# Altium PCB Smart_Clock_PCB.PcbDoc (part 2 of 2)
Units mil, origin at the board's own origin, x right, y up, seen from the top; angles counter-clockwise.
Board outline 3930 x 2549 mil, 2 copper layers (Top Layer, Bottom Layer); 123 components, 100 nets, 411 pads, 288 vias.
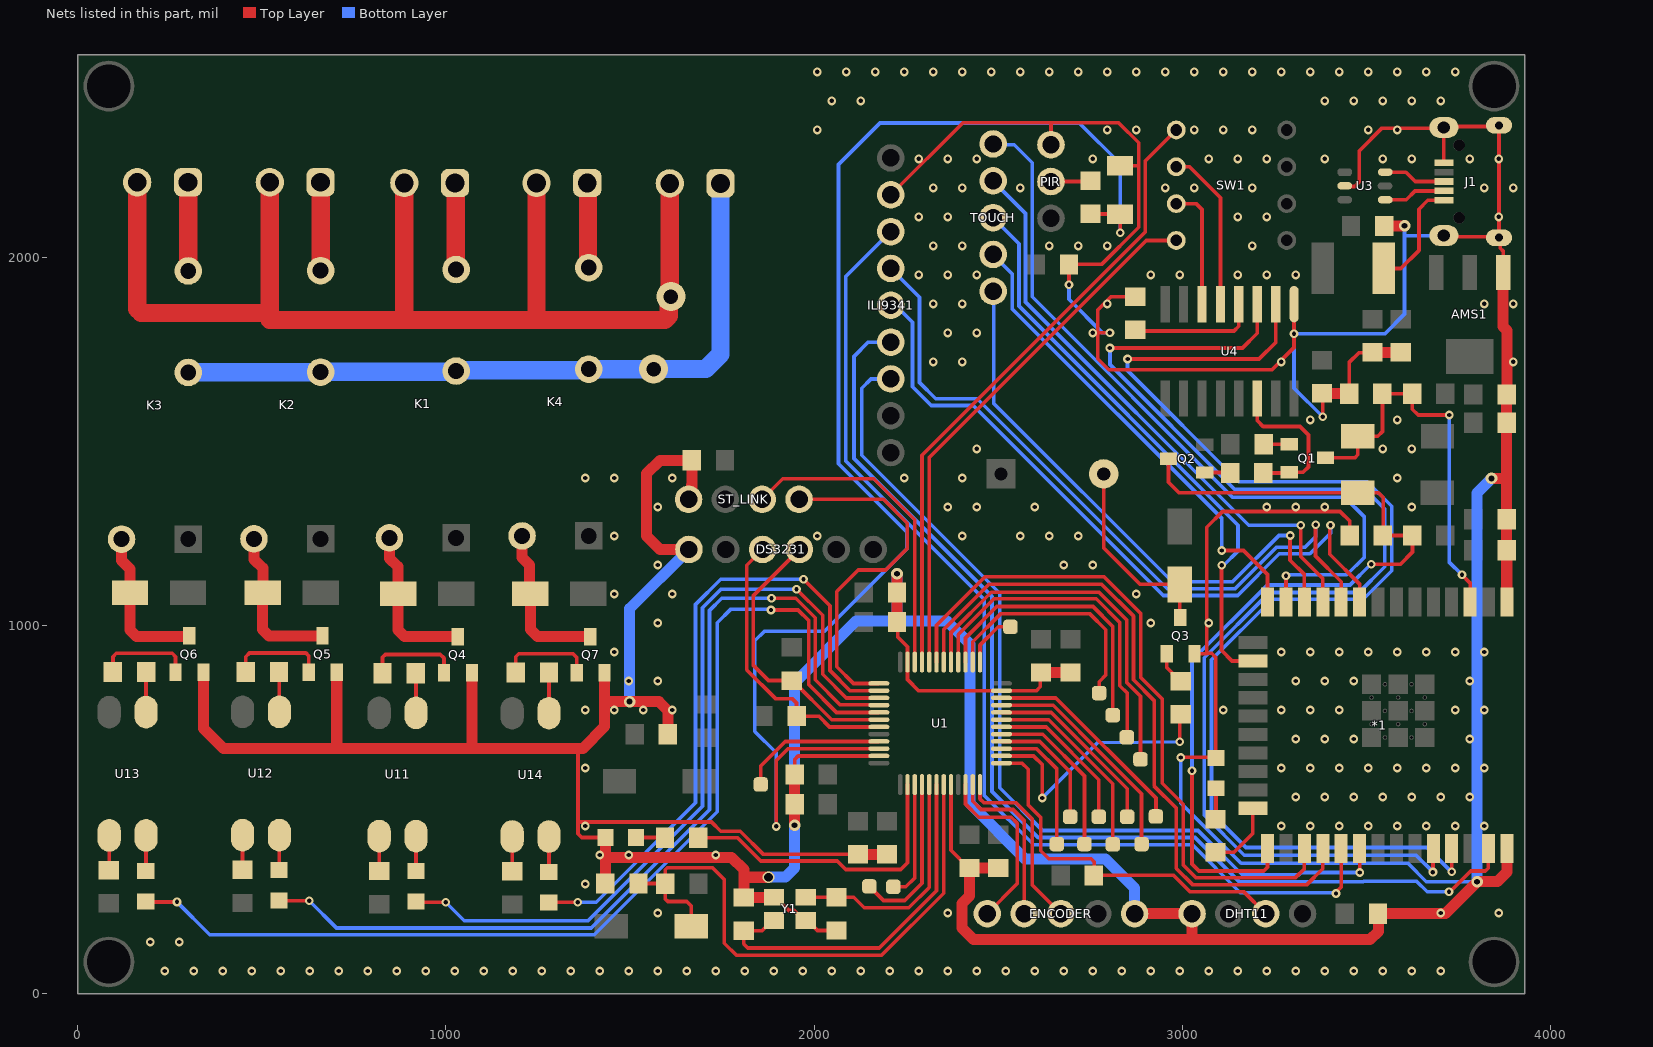
[diagram p2: the nets of this part, all layers, seen from the top]

## Via types
v1: diameter 23.62, hole 11.81, Top Layer to Bottom Layer, tented both sides, 271 vias
v2: diameter 31.5, hole 15.75, Top Layer to Bottom Layer, tented both sides, 16 vias
v3: diameter 31.5, hole 23.62, Top Layer to Bottom Layer, tented both sides, 1 vias

## Nets (pads, with @x,y where several pads share a name; then routed paths per layer and width w, separated by ;. In a path a pad name is that pad's centre, name@x,y a point inside that pad or via, vN(x,y) a via of type N, cw(c..) or ccw(c..) an arc to the next point about the centre after c; other vN are vias at no path point) (continued)
GND: *1.1 *1.38 AMS1.1 C3.1 C4.1 C5.1 C6.1 C7.1 C8.1 C9.1 C10.1 C11.1 C12.2 C13.2 C14.1 C15.1 C18.1 C19.1 C20.2 C21.2 C22.1 C23.1 C24.1 C25.1 C26.1 C27.1 C28.1 D4.2 DHT11.4 DS3231.6 ENCODER.5 ESP_LED.1 ILI9341.13 J1.5 J1.Shell PIR.3 Q3.2 Q4.2 Q5.2 Q6.2 Q7.2 R1.1 R2.1 R6.1 R7.1 ST_LINK.4 STM_LED.2 U1.8 U1.23 U1.35 U1.47 U3.2 U4.1 Y1.2 Y1.4 | length 20601.3
  Top Layer w10: 1359,666 1359,466 ; STM_LED.2@1433.66,424 1369,424 1359,434 1359,466 ; Y1.2@1890.69,261.5 1895.61,261.5 1922.97,234.14 1923.64,234.14 1931.92,225.86 1945.03,225.86 1972.39,198.5 Y1.4@1977.31,198.5 1982.23,198.5 2009.23,171.5 C12.2@2060.5,171.5 ; C11.1@1947,595 1947,636 1956.42,645.42 U1.47@2175.66,645.42 U1.47@2176.01,645.07 ; C6.1@2119,378 1862.46,378 1799.46,441 1746.14,441 1721.14,466 1359,466 ; ILI9341.13@2208,2169 2403.14,2364.14 2642,2364.14 ; C15.1@2225,1009 2226.86,1007.14 2226.86,968.14 2253.42,941.58 U1.35@2253.42,900.34 2253.42,852.58 2283.42,822.58 U1.23@2508.34,822.58 2603.58,822.58 2614,833 2614,870 C5.1@2616,872 ; U1.8@2371.53,567.66 2371.53,388.97 2418.5,342 C9.1@2421,342 ; PIR.3@2651.82,2313.82 PIR.3@2643,2305 2643,2363.14 2642,2364.14 ; v1(2692,1925) C24.1@2692,1980 2780.09,1980 2881,2080.91 2881,2246 ; v1(2803,1794) 2770,1794 ; D4.2@2830,2247.89 2879.11,2247.89 2881,2246 ; C21.2@2872,1892 2806,1892 2770,1856 2770,1794 ; v1(2995,641) 2996.21,642.21 3089.13,642.21 ESP_LED.1@3091,640.34 ; Q3.2@3032.8,922.79 3066,922.79 ; v1@3066,1006.51 3066,924 3079.21,924 3090,913.21 3090,642.55 ESP_LED.1@3091,641.55 ; v1(3071.74,1006.51) 3071.74,1006.65 3066,1012.39 3066,1266.21 3109,1309.21 3428,1309.21 3454,1283.21 R7.1@3454,1244 ; U4.1@3303.01,1871.94 v1(3303,1792) 3303,1754 3243,1694 2800,1694 2770,1724 2770,1794 ; C20.2@3379,1630 3379.5,1629.5 3381,1628 v1(3381,1566) ; U3.2@3440.59,2193.4 3442.5,2191.49 3467.49,2191.49 3480,2204 3480,2288 3542,2350 3708.17,2350 J1.Shell@3709.83,2351.68 ; R6.1@3453,1629 3452.5,1629.5 3452.5,1713.5 3479.36,1740.36 3515.36,1740.36 C26.1@3516,1741 ; J1.Shell@3709.83,2058.35 3712.78,2055.39 3856.48,2055.39 J1.Shell@3859.43,2052.44 ; J1.5@3709.83,2256.21 J1.Shell@3709.83,2351.68 ; AMS1.1@3870.55,1958.17 3870.55,2016.45 3863,2024 3863,2048.87 J1.Shell@3859.43,2052.44 ; 2642,2364.14 2826.86,2364.14 2881,2310 2881,2246 ; J1.Shell@3709.83,2351.68 3712.78,2354.61 3856.48,2354.61 J1.Shell@3859.43,2357.59 J1.Shell@3859.43,2052.44
  Top Layer w30: Q6.2@341.8,872.79 341.8,720.2 396,666 705,666 ; Q5.2@703.8,872.79 703.8,667.2 705,666 ; Q4.2@1070.91,870.68 1070.91,666 ; Q7.2@1430.8,870.79 1430.8,793 ; R2.1@1433,299 1433.33,299.33 1433.33,373 ; STM_LED.2@1433.66,424 1433.33,423.67 1433.33,373 ; R1.1@1603,704 1603,768 1578,793 v2(1499,793) 1430.8,793 ; ST_LINK.4@1659,1342 1667.57,1350.57 1667.57,1381.55 1668,1381.98 C3.1@1668,1448 1581,1448 1545,1412 1545,1243 1582,1206 DS3231.6@1660,1206 DS3231.6@1659.5,1206.5 ; v3(1876,316) 1809,316 ; Y1.2@1890.69,261.5 1890.44,261.25 1809.25,261.25 C13.2@1809,261 1809,316 ; v2(1947,457) C10.1@1947,514 C11.1@1947,595 ; C6.1@2119,378 C7.1@2198,378 ; C15.1@2225,1009 C14.1@2225,1089 v2(2225,1140) ; C9.1@2421,342 C9.1@2422,341 ; C8.1@2500,341 C9.1@2422,341 ; C5.1@2616,872 C4.1@2696,872 ; ENCODER.5@2870,217 DHT11.4@3026,217 3026,147 ; C20.2@3379.5,1629.5 R6.1@3452.5,1629.5 ; C26.1@3516,1741 C25.1@3593,1741 ; C22.1@3547.5,2084.5 3547.75,2084.75 3602.75,2084.75 v2(3603,2085) ; v2(3839,1399) 3839.29,1398.71 3869.03,1398.71 3869.75,1398 3880,1398 ; AMS1.1@3870.55,1958.17 3870.55,1811.45 3881,1801 3881,1628 C28.1@3880,1627 C27.1@3880,1550 3880,1398 ; *1.38@3881,393.71 3881,330 3855.29,304.29 3800.29,304.29 v2(3800,304) 3800,303.6 3799.25,302.85 3799.25,302.68 3713.57,217 C23.1@3531,217 3532,216 3532,169.29 3509.71,147 3026,147 ; *1.1@3881,1063 3880.5,1063.5 3880.5,1203.5 C19.1@3880,1204 C18.1@3880,1288 3880,1398 ; 705,666 1070.91,666 ; 1070.91,666 1359,666 1372,666 1430.8,724.8 1430.8,793 ; 1433.33,373 1436.33,370 1776,370 1809,337 1809,316 ; C9.1@2422,341 2422,265 2402,245 2402,178 2433,147 3026,147
  Bottom Layer w10: v1(2692,1925) 2692,1885 2783,1794 v1(2803,1794) ; v1(2995,641) 2995,518 3159.19,353.81 3612.3,353.81 3662.11,304 v2(3800,304) ; v1(3381,1566) 3303,1644 v1(3303,1792) 3550,1792 3603,1845 3603,2057.73 ; v2(3603,2085) 3603,2057.73 ; J1.Shell@3709.83,2058.37 3708.82,2057.37 3603.37,2057.37 3603,2057.73
  Bottom Layer w30: v2(1499,793) 1499,1045 DS3231.6@1660,1206 ; v3(1876,316) 1876.29,316.29 1922.29,316.29 1947,341 v2(1947,457) 1947,635.7 1946,636.7 1946,844 2114,1012 2228,1012 ; v2(2225,1140) 2225,1015 2228,1012 ; ENCODER.5@2870,217 2870,287 2791,366 2573,366 2423,516 2423,949 2360,1012 2228,1012 ; v2(3800,304) 3800,1359.6 3839,1398.6 v2(3839,1399)
  other v1: 237.09,61.62 315.83,61.62 394.57,61.62 473.31,61.62 552.05,61.62 630.79,61.62 709.53,61.62 788.27,61.62 867.01,61.62 945.75,61.62 1024.49,61.62 1103.23,61.62 1181.97,61.62 1260.71,61.62 1339.45,61.62 1418.19,61.62 1496.93,61.62 1575.67,61.62 1654.41,61.62 1733.15,61.62 1811.89,61.62 1890.63,61.62 1969.37,61.62 2048.11,61.62 2126.85,61.62 2205.59,61.62 2284.33,61.62 2363.07,61.62 2441.81,61.62 2520.55,61.62 2599.29,61.62 2678.03,61.62 2756.77,61.62 2835.52,61.62 2914.26,61.62 2993,61.62 3071.74,61.62 3150.48,61.62 3229.22,61.62 3307.96,61.62 3386.7,61.62 3465.44,61.62 3544.18,61.62 3622.92,61.62 3701.66,61.62 197.72,140.36 276.46,140.36 1575.67,219.1 2363.07,219.1 3701.66,219.1 3859.14,219.1 1378.82,297.84 1418.19,376.58 1496.93,376.58 1733.15,376.58 1378.82,455.32 3268.59,455.32 3347.33,455.32 3426.07,455.32 3504.81,455.32 3583.55,455.32 3662.29,455.32 3741.03,455.32 3819.77,455.32 3307.96,534.06 3386.7,534.06 3465.44,534.06 3544.18,534.06 3622.92,534.06 3701.66,534.06 3780.4,534.06 1378.82,612.8 3268.59,612.8 3347.33,612.8 3426.07,612.8 3504.81,612.8 3583.55,612.8 3662.29,612.8 3741.03,612.8 3819.77,612.8 3307.96,691.54 3386.7,691.54 3465.44,691.54 3780.4,691.54 1378.82,770.28 1457.56,770.28 1536.3,770.28 1615.04,770.28 3111.11,770.28 3268.59,770.28 3347.33,770.28 3426.07,770.28 3741.03,770.28 3819.77,770.28 1496.93,849.02 1575.67,849.02 3307.96,849.02 3386.7,849.02 3465.44,849.02 3780.4,849.02 1457.56,927.76 3268.59,927.76 3347.33,927.76 3426.07,927.76 3504.81,927.76 3583.55,927.76 3662.29,927.76 3741.03,927.76 3819.77,927.76 1575.67,1006.51 2914.26,1006.51 1457.56,1085.25 1615.04,1085.25 2874.89,1085.25 1575.67,1163.99 2678.03,1163.99 2756.77,1163.99 1457.56,1242.73 2008.74,1242.73 2402.44,1242.73 2559.92,1242.73 2638.66,1242.73 2717.4,1242.73 1575.67,1321.47 2363.07,1321.47 2441.81,1321.47 2599.29,1321.47 3229.22,1321.47 3307.96,1321.47 3386.7,1321.47 3622.92,1321.47 1378.82,1400.21 1457.56,1400.21 1615.04,1400.21 2244.96,1400.21 2402.44,1400.21 3583.55,1400.21 2441.81,1478.95 3544.18,1478.95 3622.92,1478.95 3347.33,1557.69 3583.55,1557.69 2323.7,1715.17 2402.44,1715.17 3268.59,1715.17 3898.51,1715.17 2363.07,1793.91 2441.81,1793.91 2756.77,1793.91 2323.7,1872.65 2402.44,1872.65 2796.14,1872.65 3819.77,1872.65 3898.51,1872.65 2284.33,1951.39 2363.07,1951.39 2441.81,1951.39 2914.26,1951.39 2993,1951.39 3150.48,1951.39 3229.22,1951.39 3307.96,1951.39 2323.7,2030.13 2402.44,2030.13 2638.66,2030.13 2717.4,2030.13 2796.14,2030.13 3189.85,2030.13 2284.33,2108.87 2363.07,2108.87 3150.48,2108.87 3229.22,2108.87 3859.14,2108.87 2323.7,2187.61 2402.44,2187.61 2559.92,2187.61 2953.63,2187.61 3032.37,2187.61 3189.85,2187.61 3819.77,2187.61 3898.51,2187.61 2284.33,2266.35 2363.07,2266.35 2441.81,2266.35 2756.77,2266.35 3071.74,2266.35 3150.48,2266.35 3229.22,2266.35 3386.7,2266.35 3544.18,2266.35 3622.92,2266.35 3780.4,2266.35 3859.14,2266.35 2008.74,2345.09 2796.14,2345.09 2874.89,2345.09 3032.37,2345.09 3111.11,2345.09 3189.85,2345.09 3504.81,2345.09 3583.55,2345.09 2048.11,2423.83 2126.85,2423.83 3386.7,2423.83 3465.44,2423.83 3544.18,2423.83 3622.92,2423.83 3701.66,2423.83 2008.74,2502.57 2087.48,2502.57 2166.22,2502.57 2244.96,2502.57 2323.7,2502.57 2402.44,2502.57 2481.18,2502.57 2559.92,2502.57 2638.66,2502.57 2717.4,2502.57 2796.14,2502.57 2874.89,2502.57 2953.63,2502.57 3032.37,2502.57 3111.11,2502.57 3189.85,2502.57 3268.59,2502.57 3347.33,2502.57 3426.07,2502.57 3504.81,2502.57 3583.55,2502.57 3662.29,2502.57 3741.03,2502.57
L: J6.1 K1.3 K2.3 K3.3 K4.3 V1.1 | length 1929.8
  Bottom Layer w50: K3.3@300.55,1686.58 300.96,1687 659.59,1687 K2.3@660,1687.41 661.5,1688.91 1026.5,1688.91 K1.3@1028,1690.41 1030.5,1692.91 1385.5,1692.91 K4.3@1388,1695.41 1388.22,1695.63 1563.71,1695.63 V1.1@1563.94,1695.86 1705.86,1695.86 1745.8,1735.8 J6.1@1745.8,2200
LED_STATUS: *1.24 R8.1 | length 192
  Top Layer w10: R8.1@3090,384 3140,384 3190.98,434.98 3190.98,504 *1.24@3191.63,503.35
LED_TEST: R5.1 U1.2 | length 827.4
  Top Layer w10: R5.1@1685,423 1685,420.5 1687.5,423 1792,423 1855,360 2063,360 2086,337 2235,337 2253.42,355.42 U1.2@2253.42,567.66
N: J2.2 J3.2 J4.2 J5.2 J6.2 V1.2 | length 3281
  Top Layer w50: J4.2@162,2203 162,1859.33 173.33,1848 522,1848 ; J3.2@522,2203 522,1830 523,1829 885,1829 ; J2.2@887.2,2201 887.2,1831.2 885,1829 ; J5.2@1246.1,2201 1246.1,1835.41 1239.7,1829 ; J6.2@1608,2200 1608,1895.89 V1.2@1611.18,1892.71 1605.68,1887.21 1605.68,1840.29 1594.39,1829 1239.7,1829 ; 885,1829 1239.7,1829
Net1_1: 1.1 U1.22 | length 582.3
  Top Layer w10: U1.22@2508.34,802.9 2656.1,802.9 2928,531 1.1@2928,481
Net2_1: 2.1 U1.21 | length 617.4
  Top Layer w10: U1.21@2508.34,783.21 2649.24,783.21 2675,757.46 2675,757 2763.47,668.53 2763.47,668.44 2889,542.91 2.1@2889,406
Net3_1: 3.1 U1.20 | length 504.2
  Top Layer w10: U1.20@2508.34,763.53 2643.47,763.53 2643.47,762.98 2850,556.46 3.1@2850,480
Net4_1: 4.1 U1.19 | length 539.7
  Top Layer w10: U1.19@2508.34,743.84 2637.16,743.84 2811,570 4.1@2811,405
Net5_1: 5.1 U1.18 | length 425
  Top Layer w10: U1.18@2508.34,724.16 2629.84,724.16 2773,581 5.1@2773,480
Net6_1: 6.1 U1.17 | length 457.7
  Top Layer w10: U1.17@2508.34,704.47 2620.53,704.47 2734,591 6.1@2734,406
Net7_1: 7.1 U1.16 | length 343
  Top Layer w10: U1.16@2508.34,684.79 2612.21,684.79 2695,602 7.1@2695,480
Net8_1: 8.1 U1.15 | length 377.5
  Top Layer w10: U1.15@2508.34,665.1 2603.9,665.1 2659,610 8.1@2659,406
Net9_1: 9.1 U1.25 | length 149.3
  Top Layer w10: U1.25@2450.27,900.34 2450.27,946.27 2500,996 9.1@2533,996
Net10_1: 10.1 U1.26 | length 645.2
  Top Layer w10: U1.26@2430.58,900.34 2430.58,955.58 2506,1031 2749,1031 2792,988 2792,865 2774,847 10.1@2774,816
Net11_1: 11.1 U1.27 | length 764.3
  Top Layer w10: U1.27@2410.9,900.34 2410.9,965.9 2496,1051 2757,1051 2811,997 11.1@2811,756
Net12_1: 12.1 U1.28 | length 900.7
  Top Layer w10: U1.28@2391.21,900.34 2391.21,974.76 2488.46,1072 2766,1072 2830,1008 2830,836 2850,816 2850,697 12.1@2849,696
Net13_1: 13.1 U1.29 | length 1028.1
  Top Layer w10: U1.29@2371.53,900.34 2371.53,980.53 2481,1090 2773.46,1090 2849,1014.46 2849,844.54 2886,807.54 13.1@2886,636
Net14_1: 14.1 U1.4 | length 445.8
  Top Layer w10: 14.1@2150,291 2188,253 2246,253 2292.79,299.79 U1.4@2292.79,567.66
Net15_1: 15.1 U1.3 | length 325.5
  Top Layer w10: 15.1@2202,278 2203,278 15.1@2205,280 ; 15.1@2215,290 2249,290 2273,314 2273,358 2273.1,358.1 U1.3@2273.1,567.66
Net16_1: 16.1 U1.45 | length 398.3
  Top Layer w10: 16.1@1855,568 1855,618 1921.79,684.79 U1.45@2175.66,684.79
Net*1_3: *1.3 C16.1 Q1.3 R6.2 RST_ESP.1 | length 1077.7
  Top Layer w10: Q1.3@3388.43,1454.6 3467.6,1454.6 3476,1463 RST_ESP.1@3476,1513 3476.42,1513.42 3530.42,1513.42 3543,1526 R6.2@3543,1629 C16.1@3624,1629 3624,1587 3640,1571 v1(3724,1571) ; v1(3759,1137) 3781,1115 *1.3@3781,1063
  Bottom Layer w10: v1(3724,1571) 3724,1172 v1(3759,1137)
Net*1_9: *1.9 ILI9341.10 | length 1958.3
  Top Layer w10: v1(3402,1272) 3400,1270 3400,1193 3481,1112 *1.9@3481,1063
  Bottom Layer w10: ILI9341.10@2208,1869 2221,1869 2267,1823 2267,1648 2318,1597 2432,1597 2948,1081 3149.91,1081 3262.91,1194 3346,1194 3402,1250 v1(3402,1272)
Net*1_10: *1.10 ILI9341.11 | length 1980.5
  Top Layer w10: v1(3362,1273) 3361,1272 3361,1188 3431,1118 *1.10@3431,1063
  Bottom Layer w10: ILI9341.11@2208,1969 2286,1891 2286,1659 2330,1615 2443,1615 2959,1099 3142.46,1099 3255.46,1212 3333,1212 3362,1241 v1(3362,1273)
Net*1_11: *1.11 TOUCH.4 | length 1597.1
  Top Layer w10: v1(3321,1272) 3321,1187 3381,1127 *1.11@3381,1063
  Bottom Layer w10: TOUCH.4@2485.5,2206.5 2574,2118 2574,1877.8 3179.8,1272 v1(3321,1272)
Net*1_12: *1.12 TOUCH.1 | length 1558.6
  Top Layer w10: v1(3293,1244) 3292,1243 3292,1177 3331,1138 *1.12@3331,1063
  Bottom Layer w10: TOUCH.1@2486.91,1904.91 2487.91,1903.91 2487.91,1602.09 2972,1118 3136,1118 3262,1244 v1(3293,1244)
Net*1_13: *1.13 TOUCH.5 | length 2054.7
  Top Layer w10: *1.13@3281,1063 v1(3281,1135)
  Bottom Layer w10: TOUCH.5@2486,2305 2543,2305 2592,2256 2592,1892 3136,1348 3440,1348 3494,1294 3494,1185 3446.06,1137.06 3283.06,1137.06 v1(3281,1135)
Net*1_14: *1.14 TOUCH.2 | length 1286.9
  Top Layer w10: v1(3107,1203) 3166,1203 3231,1138 *1.14@3231,1063
  Bottom Layer w10: TOUCH.2@2485.5,2006.5 2538,1954 2538,1859 3107,1290 v1(3107,1203)
Net*1_16: *1.16 TOUCH.3 | length 1569.2
  Top Layer w10: v1(3107,1163) 3106,1162 3106,932 3134.65,903.35 *1.16@3191.63,903.35
  Bottom Layer w10: TOUCH.3@2485.5,2106.5 2556,2036 2556,1867 3151,1272 3151,1202 3112,1163 v1(3107,1163)
Net*1_25: *1.25 BOOT_ESP.1 C17.1 Q2.3 R7.2 | length 2434
  Top Layer w10: Q2.3@2962,1452 2962,1388.46 2990.46,1360 BOOT_ESP.1@3475.46,1360 3532,1360 3545,1347 3545,1245 R7.2@3544,1244 C17.1@3624,1244 ; v1(3026,605) 3026,352 3045,333 3221,333 3231,343 *1.25@3231,393.71 ; v1(3512.78,1165.96) 3591.78,1165.96 3624.78,1198.96 3624.78,1242.96 C17.1@3623.78,1243.96
  Bottom Layer w10: v1(3026,605) 3026,905 3230.65,1109.64 3454.65,1109.64 3511,1166 v1@3513,1166
Net*1_27: *1.27 U1.31 | length 1889.1
  Top Layer w10: U1.31@2332.16,900.34 2332.16,1000.16 2464,1132 2787,1132 2887,1032 2887,858 2945,800 2945,571 3002,514 3002,349 3036,315 3307,315 3331,339 *1.27@3331,393.71
Net*1_28: *1.28 U1.30 | length 1911.8
  Top Layer w10: U1.30@2351.84,900.34 2351.84,988.84 2474.14,1111.14 2780.86,1111.14 2867,1025 2867,852 2923,796 2923,564 2983,504 2983,340 3027,296 3338,296 3381,339 *1.28@3381,393.71
Net*1_29: *1.29 ILI9341.12 | length 2930
  Top Layer w10: v1(3417,272) 3417,275.69 3431,289.69 *1.29@3431,393.71
  Bottom Layer w10: ILI9341.12@2208,2069 2086,1947 2086,1446 2462,1070 2462,538 2596,404 3027,404 3157.07,273.93 3415.07,273.93 v1(3417,272)
Net*1_30: *1.30 ILI9341.8 | length 2471.6
  Top Layer w10: v1(3481,329) *1.30@3481,393.71
  Bottom Layer w10: ILI9341.8@2208,1669 2154,1669 2129,1644 2129,1462 2504,1087 2504,559 2620,443 3042,443 3162,323 3316.66,323 3322.66,329 v1(3481,329)
Net*1_34: *1.34 U4.3 | length 3374.5
  Top Layer w10: v1(2803,1753) 3163,1753 3203.02,1793.02 U4.3@3203.02,1871.95 ; v1(3680,330) 3680,392.71 *1.34@3681,393.71
  Bottom Layer w10: v1(2803,1753) 2803,1708 3142,1369 3496,1369 3549,1316 3549,1159 3479,1089 3236,1089 3059,912 3059,485 3168,376 3634,376 v1(3680,330)
Net*1_35: *1.35 U4.2 | length 3386.9
  Top Layer w10: v1(2851,1723) 3208,1723 3253.02,1768.02 U4.2@3253.02,1871.95 ; v1(3731,330.55) *1.35@3731,393.71
  Bottom Layer w10: v1(2851,1723) 2851,1692 3153,1390 3501,1390 3568,1323 3568,1148 3491,1071 3243.46,1071 3079,906.54 3079,490.46 3172.46,397 3664,397 3730.45,330.55 v1(3731,330.55)
Net*1_37: *1.37 ILI9341.9 | length 2993.1
  Top Layer w10: v1(3723.67,276.33) 3726.33,276.33 3782.75,332.75 3822.18,332.75 3830,340.57 3830,392.71 *1.37@3831,393.71
  Bottom Layer w10: ILI9341.9@2208,1769 2147,1769 2108,1730 2108,1453 2483,1078 2483,549 2608,424 3034,424 3153.81,304.19 3491.28,304.19 3491.84,304.75 3635.91,304.75 3664.33,276.33 v1(3723.67,276.33)
NetB5_2: BUZZER.2 D3.1 Q3.3 | length 539.3
  Top Layer w10: BUZZER.2@2786,1411 2786,1210 2884.64,1111.36 2992.64,1111.36 D3.1@2993,1111 2993,1022.41 Q3.3@2994.2,1021.21
NetC21_1: C21.1 U4.4 | length 346.8
  Top Layer w10: C21.1@2872,1800 2873,1799 3140,1799 3153.02,1812.02 U4.4@3153.02,1871.95
NetD1_1: R5.2 STM_LED.1 | length 79.1
  Top Layer w10: STM_LED.1@1516.34,424 1594,424 R5.2@1595,423
NetD2_2: ESP_LED.2 R8.2 | length 84.1
  Top Layer w10: R8.2@3090,474 3091,475 ESP_LED.2@3091,557.66
NetD4_1: D4.1 R13.2 U1.46 | length 3811.7
  Top Layer w10: v1(1897,454) 1897,633 1929.1,665.1 U1.46@2175.66,665.1 ; R13.2@2750,2117 2829,2117 2831,2115 v1(2831,2066)
  Bottom Layer w10: v1(1897,454) 1897,654 1839,712 1839,958 1865,984 2028.34,984 2252,1207.66 2252,1253 2066,1439 2066,2251.54 2178.46,2364 2720,2364 2831,2253 v1(2831,2066)
NetD5_1: D5.1 K1.2 Q4.3 | length 429.6
  Top Layer w30: K1.2@846.9,1237.65 846.9,1236.92 847.39,1236.43 847.39,1181.61 870,1159 870,1086.52 D5.1@870.52,1086 870.52,986.79 888.09,969.21 Q4.3@1032.2,969.21
NetD6_1: D6.1 K2.2 Q5.3 | length 426.3
  Top Layer w30: K2.2@478.9,1234.65 479.39,1234.16 479.39,1178.61 503,1155 503,1088.48 D6.1@502.52,1088 502.52,988.57 520.09,971 664.99,971 Q5.3@665.2,971.21
NetD7_1: D7.1 U11.2 | length 94.7
  Top Layer w10: D7.1@919,333 U11.2@919,427.68
NetD7_2: D7.2 U1.39 | length 2183.2
  Top Layer w10: D7.2@919,250.32 921.32,248 v1(1000,248) ; v1(1952.13,1098.19) 2023,1027.32 2023,867 2087.1,802.9 U1.39@2175.66,802.9
  Bottom Layer w10: v1(1000,248) 1050,198 1386,198 1697,509 1697,1048 1747.19,1098.19 v1(1952.13,1098.19)
NetD8_1: D8.1 U12.2 | length 95.4
  Top Layer w10: D8.1@547,335.34 548,336.34 U12.2@548,430.35
NetD8_2: D8.2 U1.40 | length 2566.2
  Top Layer w10: D8.2@547,252.66 547.66,252 v1(629,252) ; v1(1884,1073.38) 1941.85,1073.38 1941.92,1073.31 1950.14,1073.31 2003,1020.46 2003,852 2071.01,783.99 2150.96,783.99 2151.4,783.56 2175.31,783.56 U1.40@2175.66,783.21
  Bottom Layer w10: v1(629,252) 703,178 1395,178 1716,499 1716,1040 1749.38,1073.38 v1(1884,1073.38)
NetD9_1: D9.1 K3.2 Q6.3 | length 424.3
  Top Layer w30: K3.2@119.45,1233.83 119.45,1176.55 142.52,1153.48 D9.1@142.52,1088 142.52,987.57 160.09,970 301.99,970 Q6.3@303.2,971.21
NetD10_1: D10.1 K4.2 Q7.3 | length 434.3
  Top Layer w30: K4.2@1206.9,1242.65 1206.9,1184.1 1227,1164 1227,1088.26 D10.1@1229.26,1086 1229.26,988.57 1248.62,969.21 Q7.3@1392.2,969.21
NetD11_1: D11.1 U13.2 | length 97.1
  Top Layer w10: D11.1@185,333 186,334 U13.2@186,429.68
NetD11_2: D11.2 U1.41 | length 2912.8
  Top Layer w10: D11.2@185,250.32 186.32,249 v1(270,249) ; v1(1882.71,1041.78) 1956.22,1041.78 1985,1013 1985,839 2060.47,763.53 U1.41@2175.66,763.53
  Bottom Layer w10: v1(270,249) 359,160 1403,160 1737,494 1737,1007 1774,1044 1880.49,1044 v1(1882.71,1041.78)
NetD12_1: D12.1 U14.2 | length 96.8
  Top Layer w10: D12.1@1279,330.34 1280,331.34 U14.2@1280,426.68
NetD12_2: D12.2 U1.38 | length 1803.9
  Top Layer w10: D12.2@1279,247.66 1279.34,248 v1(1358,248) ; v1(1971,1125) 2043,1053 2043,877 2097.42,822.58 U1.38@2175.66,822.58
  Bottom Layer w10: v1(1358,248) 1408,248 1678,518 1678,1056.54 1746.46,1125 v1(1971,1125)
NetF1_0: F1.0 J1.1 | length 305.6
  Top Layer w10: F1.0@3546.41,1969 3593,1969 3642,2018 3642,2130 3665.85,2153.85 J1.1@3709.83,2153.85
NetJ1_2: J1.2 U3.4 | length 169.2
  Top Layer w10: U3.4@3550.59,2155.4 3607.4,2155.4 3631.41,2179.41 J1.2@3709.83,2179.44
NetJ1_3: J1.3 U3.6 | length 169.8
  Top Layer w10: U3.6@3550.59,2230.4 3606.6,2230.4 3632,2205 J1.3@3709.83,2205.03
NetJ2_1: J2.1 K1.4 | length 236.2
  Top Layer w50: J2.1@1025,2201 1026.5,2199.5 1026.5,1967.5 K1.4@1028,1966
NetJ3_1: J3.1 K2.4 | length 240.1
  Top Layer w50: J3.1@659.8,2203 659.9,2202.9 659.9,1963.1 K2.4@660,1963
NetJ4_1: J4.1 K3.4 | length 241.1
  Top Layer w50: J4.1@299.8,2203 300.17,2202.62 300.17,1962.55 K3.4@300.55,1962.17
NetJ5_1: J5.1 K4.4 | length 231.7
  Top Layer w50: J5.1@1383.9,2201 1385.95,2198.95 1385.95,1973.05 K4.4@1388,1971
NetQ1_1: Q1.1 R9.2 | length 70
  Top Layer w10: R9.2@3220.21,1491.8 Q1.1@3290.21,1491.8
NetQ2_1: Q2.1 R10.2 | length 69.4
  Top Layer w10: Q2.1@3060.21,1414.8 3128.21,1414.8 R10.2@3129.21,1413.8
NetQ3_1: Q3.1 R12.2 | length 92.2
  Top Layer w10: Q3.1@2956.94,922.94 2956.94,886.06 2972.5,870.5 2972.5,868 2992.5,848 R12.2@2995,848
NetQ4_1: Q4.1 R16.1 | length 257.5
  Top Layer w10: R16.1@828,870 828,913 836,921 985,921 995,911 Q4.1@995,871
NetQ5_1: Q5.1 R17.1 | length 264.5
  Top Layer w10: R17.1@457,873 457,915 467,925 620,925 628,917 Q5.1@628,873
NetQ6_1: Q6.1 R20.1 | length 261.5
  Top Layer w10: R20.1@96,873 96,915 105,924 257,924 266,915 Q6.1@266,873
NetQ7_1: Q7.1 R21.1 | length 257.5
  Top Layer w10: R21.1@1190,872 1190,915 1198,923 1345,923 1355,913 Q7.1@1355,871
NetR3_2: DS3231.4 R3.2 U1.43 | length 788.1
  Top Layer w10: DS3231.4@1860,1206 1817,1163 1817,879 1895,801 1940,801 1952,789 1952,754 R3.2@1952.5,753.5 2012.54,753.5 2041.89,724.16 U1.43@2175.66,724.16
NetR4_2: DS3231.3 R4.2 U1.42 | length 768.4
  Top Layer w10: DS3231.3@1960,1206 1835,1081 1835,891 1876,850 1941.5,850 2047.66,743.84 U1.42@2175.66,743.84
NetR11_1: DHT11.2 R11.1 U1.13 | length 1019.9
  Top Layer w10: U1.13@2508.34,625.73 2564.27,625.73 2581,609 2581,512 2615,478 2615,388 2637,366 2752,366 2760.36,357.64 2760.36,322.36 R11.1@2759,321 2976,321 3020,277 3166,277 DHT11.2@3226,217
NetR12_1: R12.1 U1.14 | length 722.3
  Top Layer w10: U1.14@2508.34,645.42 2595.58,645.42 2619,622 v1(2619,531) ; v1(2992.96,684.04) 2992.96,755.96 R12.1@2995,758
  Bottom Layer w10: v1(2619,531) 2766.07,678.07 2769,681 v1(2992.96,684.04)
NetR13_1: PIR.2 R13.1 | length 109.7
  Top Layer w10: PIR.2@2644.82,2205 PIR.2@2643,2205 2748,2205 R13.1@2750,2207
NetR14_1: R14.1 U11.1 | length 94.7
  Top Layer w10: R14.1@819,333 U11.1@819,427.68
NetR15_1: R15.1 U12.1 | length 94.4
  Top Layer w10: R15.1@448,336 U12.1@448,430.35
NetR16_2: R16.2 U11.3 | length 108.1
  Top Layer w10: R16.2@918,870 919,869 U11.3@919,762.32
NetR17_2: R17.2 U12.3 | length 108.4
  Top Layer w10: R17.2@547,873 548,872 U12.3@548,765
NetR18_1: R18.1 U13.1 | length 95.1
  Top Layer w10: R18.1@85,335 86,336 U13.1@86,429.68
NetR19_1: R19.1 U14.1 | length 94.7
  Top Layer w10: R19.1@1180,332 U14.1@1180,426.68
NetR20_2: R20.2 U13.3 | length 108.7
  Top Layer w10: U13.3@186,764.32 R20.2@186,873
NetR21_2: R21.2 U14.3 | length 110.7
  Top Layer w10: U14.3@1280,761.32 R21.2@1280,872
NetSW1_5: SW1.5 U1.33 | length 1730.6
  Top Layer w10: U1.33@2292.79,900.34 2292.79,1461.79 2899,2068 2899,2261 SW1.5@2983,2345
NetSW1_8: SW1.8 U1.32 | length 1469.9
  Top Layer w10: U1.32@2312.47,900.34 2312.47,1455.47 2902,2045 SW1.8@2983,2045
NetU1_10: ENCODER.1 U1.10 | length 493.8
  Top Layer w10: U1.10@2410.9,567.66 2410.9,515.1 2447,479 2535,479 2551,463 2551,298 ENCODER.1@2470,217
NetU1_11: ENCODER.2 U1.11 | length 459.4
  Top Layer w10: U1.11@2430.58,567.66 2430.58,522.42 2453,500 2540,500 2570,470 ENCODER.2@2570,217
NetU1_12: ENCODER.3 U1.12 | length 492.6
  Top Layer w10: U1.12@2450.27,567.66 2450.27,528.73 2461,518 2548,518 2592,474 2592,295 ENCODER.3@2670,217
OSC_IN: C12.1 U1.5 Y1.1 | length 649.1
  Top Layer w10: Y1.1@1977.31,261.5 C12.1@2060.5,261.5 2107.5,261.5 2136,233 2257,233 2312.47,288.47 U1.5@2312.47,567.66
OSC_OUT: C13.1 U1.6 Y1.3 | length 1009.6
  Top Layer w10: Y1.3@1890.69,198.5 1885.77,198.5 1858.27,171 C13.1@1809,171 1809,135 1820,124 2176.82,124 2266.82,214 2267,214 2332.16,279.16 U1.6@2332.16,567.66
RESET: C2.1 R2.2 RST_STM.1 U1.7 | length 1607
  Top Layer w10: R2.2@1523,299 C2.1@1595,299 ; RST_STM.1@1666,183 1666,238 1654,250 1603,250 1596,257 1596,336.14 1601.86,342 1724,342 1756,310 1756,137 1789,104 2183,104 2351.84,272.84 U1.7@2351.84,567.66
RTS: Q1.2 R10.1 U4.14 | length 431.7
  Top Layer w10: U4.14@3203.02,1616.05 3203.02,1555.98 3219,1540 3319,1540 3342,1517 3342,1430 3328,1416 Q1.2@3290,1416 3287.8,1413.8 R10.1@3219.21,1413.8
SWCLK: ST_LINK.1 U1.37 | length 966.2
  Top Layer w10: ST_LINK.1@1959,1342 2188,1342 2253,1277 2253,1208.66 2194.34,1150 2120,1150 2061.5,1091.5 2061.5,887.5 2106.73,842.27 U1.37@2175.66,842.27
SWDIO: ST_LINK.2 U1.34 | length 869.9
  Top Layer w10: ST_LINK.2@1859,1342 1915,1398 2162,1398 2273.1,1286.9 U1.34@2273.1,900.34
UD+: SW1.6 U4.5 | length 443.9
  Top Layer w10: SW1.6@2983,2245 3019,2245 3103.02,2160.98 U4.5@3103.02,1871.95
UD-: SW1.7 U4.6 | length 333.7
  Top Layer w10: SW1.7@2983,2145 3037,2145 3053.02,2128.98 U4.6@3053.02,1871.95
pads on no net: *1.4 *1.5 *1.6 *1.7 *1.8 *1.15 *1.17 *1.18 *1.19 *1.20 *1.21 *1.22 *1.23 *1.26 *1.31 *1.32 *1.33 *1.36 *1.39 DHT11.3 DS3231.1 DS3231.2 H1.1 H2.1 H3.1 H4.1 ILI9341.6 J1.4 J1.MH1 J1.MH2 U4.7 U4.8 U4.9 U4.10 U4.11 U4.12 U4.15

## Polygon pours and split planes (outlines as drawn)
GND on Top Layer "NONET_L-01_P-001" (solid, remove dead copper, pour order 0): 0,2549 1,2550 3929,2550 3929,0 0,0
GND on Bottom Layer "NONET_L-01_P-001" (solid, remove dead copper, pour order 1): 0,2549 3930,2549 3930,0 0,0

## Keep-outs
Top Layer:
  rectangle: 18,559 1337,625

## Other copper
Top Layer:
  region net +3.3V: 3831,1023 3813.01,1023 3813,1022.99 3813,1023.73 3831.73,1023.73 3835.5,1027.5
  region net +3.3V: 3843.94,1023 3831,1023 3840,1032 3848,1032
  region net +3.3V: 3849,1101 3849,1023 3843.94,1023
  region net +3.3V: 3849,1141 3849,1153 3815,1187 3796,1168 3796,1161 3801,1161 3835,1127
  region net +3.3V: 3849,1101 3849,1141 3821,1113 3821,1111
  region net +3.3V: 3813,1023.73 3813,1116 3816,1116 3826,1106 3824,1104 3824,1023.73
  region net +3.3V: 3682,1235 3694.29,1204.5 3705.5,1178 3754,1178 3767,1191
  region net +3.3V: 3688.58,1218 3700,1191 3711,1165 3772,1165
  region net +3.3V: 3784,1142 3697.5,1228.5 3709,1240 3775,1240
  region net +3.3V: 3686,1764 3677,1755 3677,1610 3686,1601
  region net +5V_USB: 3483,1897 3507,1873 3507,1859 3463,1859
  region net +5V_USB: 3483,2099 3479.28,2095.28 3479.28,2092.02
  region net +5V_USB: 3479.75,2102.5 3483.25,2106 3488,2106 3488,2104 3483,2099
  region net +5V_USB: 3483,2099 3479.28,2095.28 3479.28,2102.03 3479.75,2102.5
  region net +5V_USB: 3476.5,2106 3476.5,2105.5 3483,2099
  region net +5V_USB: 3483,2099 3483,1873 3478,1868 3441,1905 3441,2039
  region net +5V_USB: 3512,2181.84 3512,2128 3483,2099 3479.75,2127.09
  region net +5V_USB: 3479.51,2112 3378,2112 3351,2083 3351,1988 3395,1988 3479.05,2072.05
  region net +5V_USB: 3550,2203 3512,2203 3485,2179 3485,2136
  region net +5V_USB: 3485,2136 3455,2106 3476.5,2106 3502,2131.5
  region net +5V_USB: 3552,2183 3525,2183 3515,2193
  region net NetF1_0: 3668.46,2163 3650,2163 3628,2141 3628,2059 3640.46,2059
  region net NetF1_0: 3659.68,2128.26 3656.46,2125.04 3656.46,2113 3654.46,2111
  region net NetF1_0: 3659,2126 3659,2024 3585,1950 3565,1950
  region net NetF1_0: 3628,2068 3593,2033 3593,2028 3626,2028 3628,2026
  region net NetF1_0: 3576,1899 3585,1908 3585,1950 3565,1950
  region net NetF1_0: 3585,1950 3574,1940 3564,1942 3564,1949 3565,1950
  region net NetF1_0: 3681,2145 3678,2145 3659,2126 3653.92,2124.08 3653.92,2146.43
  region net NetF1_0: 3585,2039 3639,2039 3639,2021 3642,2018 3593,1969 3569.7,1969
  region net NetF1_0: 3634.23,2059 3614.23,2039 3639,2039 3647.07,2047.07
  region net NetF1_0: 3608,2039 3521,2039 3521,2017.7 3569.7,1969
  region net NetF1_0: 3628,2059 3626.62,2039 3620.46,2039 3640.46,2059
  region net NetF1_0: 3668.46,2163 3736,2163 3736,2145 3663,2145 3662,2146
  region net +5V_USB: 3362,1857.78 3366,1857.78 3375,1848.78 3373,1846.78 3362,1846.78 3362,1861.74 3362,1852.28
  region net +5V_USB: 3362,1861.74 3362.03,1861.74 3366,1857.78 3362.48,1854.26 3362,1854.26
  region net +5V_USB: 3351.01,1881.59 3351.01,1728.62 3375.01,1728.62 3381.01,1734.62 3381.01,1880.62
  pour cut-out: -3,634 1351,634 1351,196 -2.22,196
  region net +3.3V: 3845,1121 3815,1151 3815,1187
  region net +3.3V: 3815,1187 3825,1160 3835,1132 3815,1132 3810.5,1136.5
  region net +3.3V: 3815,1177 3815,1146 3811,1146 3781,1176
  region net +3.3V: 3703.64,1223.36 3764,1163 3774,1163 3774,1208 3742,1240
  region net +3.3V: 3686,1225 3689.5,1228.5 3697.5,1228.5 3697.5,1225.5 3689,1217
  region net +3.3V: 3680,1264 3682,1262 3697,1262 3697,1236 3686,1225
  region net +3.3V: 3716,1287 3788,1287 3806,1269 3759.75,1222.75 3732.75,1222.75
  region net +3.3V: 3815,1281 3815,1215 3814,1214 3724,1304 3717,1304
  region net +3.3V: 3815,1315 3815,1423.34 3812.42,1425.92 3774,1387.5 3774,1327
  region net +3.3V: 3647,1327 3774,1327 3789,1312 3722,1245 3699,1245
  region net +3.3V: 3726.27,1360.23 3769.52,1360.23 3790,1339.75 3777.25,1327 3727,1327
  region net +3.3V: 3647,1327 3650,1330 3784,1330 3784,1357.46 3786.77,1360.23 3790,1357 3790,1322.5
  region net +3.3V: 3647,1327 3689,1285 3689,1217
  region net +3.3V: 3754,1545 3768,1559 3776,1559 3776,1543 3779.88,1539.12
  region net +3.3V: 3647,1546 3647,1379 3665.77,1360.23 3786.77,1360.23 3786.77,1532.23 3773,1546
  region net +3.3V: 3822,1423 3813.71,1414.71 3795.31,1403.5 3788,1410.81 3788,1431
  region net +3.3V: 3824.92,1425.92 3812.42,1425.92 3790,1403.5 3788,1405.5 3788,1431
  region net +3.3V: 3824.92,1425.92 3802.5,1403.5 3788.13,1403.5
  region net +3.3V: 3834,1482 3853,1463 3853,1434 3842,1423 3802,1423 3802,1488 3790,1500
  region net +3.3V: 3739,1602 3773,1568 3774,1568 3774,1620 3781,1627
  region net +3.3V: 3834,1666 3834,1482 3828,1476 3820,1484 3788,1484 3788,1696 3807,1715
  region net +3.3V: 3847,1751 3847,1679 3834,1666 3764.5,1735.5 3764.5,1755
  region net +3.3V: 3706,1784 3686,1764 3686,1601 3817,1601 3814,1604 3814,1782
  region net +3.3V: 3799,1840 3847,1792 3847,1751 3793,1751 3746,1798
  region net +3.3V: 3799,1999 3799,1840 3781,1822
  region net +3.3V: 3760,1999 3761,1998 3761,1839 3706,1784 3735,1755 3794,1755
  region net +5V_USB: 3338.4,1670.2 3338.4,1671.2 3348.6,1681.4
  region net +5V_USB: 3329,1660.79 3338.4,1670.2 3338.4,1671.2 3322.3,1671.2 3318.6,1667.5
  region net +5V_USB: 3329.21,1661 3329,1660.79 3329,1577 3319,1567 3314,1567 3314,1668 3308,1674
  region net +5V_USB: 3433,1740 3418,1725 3412,1725 3412,1734
  region net +5V_USB: 3423,1734 3427,1734 3486,1793 3477,1802 3399,1802
  region net +5V_USB: 3423,1734 3423,1797 3358,1797 3353,1792 3359,1786 3359,1707
  region net +5V_USB: 3523,1792 3548,1817 3548,1826 3387,1826 3353,1792
  region net +5V_USB: 3726,1907 3726,1862 3656,1792 3611,1792 3611,1833 3606,1838
  region net +5V_USB: 3726,1907 3611,1792 3523,1792 3630,1899
  region net +5V_USB: 3600,1903 3568,1871 3603,1871 3605,1869
  region net +5V_USB: 3670,2006 3600,1936 3600,1895 3714,1895 3726,1907 3726,1996 3716,2006
  region net +5V_USB: 3423,1710 3423,1734 3412,1734 3388,1710
  region net +5V_USB: 3407,1681.4 3416.4,1681.4 3423,1688 3423,1710 3401.6,1710 3397.3,1705.7
  region net +5V_USB: 3317,1730 3356,1769 3359,1766 3359,1713
  region net +5V_USB: 3349,1739 3349,1730 3333,1730
  region net +5V_USB: 3348.8,1705.7 3348.8,1718.8 3351,1721 3359,1713 3359,1701
  region net +5V_USB: 3349,1730 3355,1730 3356,1729 3348,1721 3337,1721
  region net +5V_USB: 3348.6,1681.4 3407,1681.4 3407,1696 3397.3,1705.7 3348.8,1705.7
  region net +5V_USB: 3349,1730 3317,1730 3291,1702 3290,1701 3290,1661 3328.21,1661 3348.6,1681.4
  region net +5V_USB: 3583,1873 3578,1868 3578,1853.5
  region net +5V_USB: 3460,1891 3478,1873 3478,1868 3457,1868 3453,1864
  region net +5V_USB: 3460,1873 3583,1873 3578,1868 3578,1839 3452,1839 3448,1835
  region: 3349,1862 3349,1851
  region net +5V_USB: 3353,1858 3353,1726 3354,1725 3366,1725
  region net +5V_USB: 3351,1902 3351,1862 3392,1903
  region net +5V_USB: 3460,1940 3460,1842 3382.5,1842 3374,1850.5 3374,1953
  region net +5V_USB: 3409,2039 3441,2039 3460,2020 3460,1940 3409,1940 3399,1930
  region net N: 210,2263 220,2253 220,1793 120,1793 120,2258 115,2263 105,2253 105,1808 115,1798 120,1793
  region net N: 115,2263 210,2263 210,1883 120,1793
  region net N: 1560,2263 1649,2263 1659,2253 1660,1915
  region net N: 1560,2263 1550,2253 1550,1904 1555,1915 1660,1915
  region net N: 1660,1915 1545,1917 1545,1904 1660,1905 1546,1905 1660,1905
  region net N: 1189,1920 1173,1904 1174,1903 1192,1903
  region net N: 1304,1921 1322,1903 1322,1894 1301,1894
  region net N: 1200,2263 1295,2263 1295,1877 1200,1877 1196,1881
  region net N: 1295,2263 1305,2253 1305,1865 1304,1866 1260,1866
  region net N: 1200,2263 1190,2253 1189,2253 1189,1888 1203,1874
  region net N: 830,1918 816,1904 816,1901 836,1901
  region net N: 940,1918 954,1904 946,1904 940,1898
  region net N: 840,2263 930,2263 930,2090 845,2090
  region net N: 840,2263 830,2253 830,1873 832,1871 906,1871
  region net N: 930,2263 940,2253 940,1898 927,1885 855,1885
  region net N: 580,1918 594,1904 585,1904 580,1899
  region net N: 465,1918 451,1904 465,1904
  region net N: 475,2263 465,2253 465,1904 472,1897 474,1899 580,1899 580,2241
  region net N: 570,2263 580,2253 580,2241 497,2241 475,2263
  region net N: 220,1923 239,1904 220,1904 219,1905
  region net N: 1505,1904 186,1904 175,1893 182,1886 182,1793 1505,1793
  region net N: 1529,1904 1550,1925 1550,1904
  region net N: 1660,1905 1660,1807 1646,1793 1500,1793 1500,1904
Bottom Layer:
  pour cut-out: -2,551 1350,551 1350,1537 0,1537
  region net L: 1800,2213 1800,1643 1790,1633 1739,1633 1717,1655
  region net L: 1671,1753 1687,1769 1687,1753
  region net L: 539,1753 539,1623 124,1623 104,1643 104,1733 105,1734 125,1753
  region net L: 634,1623 539,1623 539,1634 623,1634
  region net L: 832,1623 634,1623 623,1634 821,1634
  region net L: 1041,1623 832,1623 821,1634 1030,1634
  region net L: 1148,1623 1041,1623 1023,1641 1024,1642 1144,1642
  region net L: 1206,1623 1148,1623 1137,1634 1139,1636 1206,1636
  region net L: 1268,1624 1267,1623 1206,1623 1206,1634 1205,1635 1206,1636 1268.5,1636
  region net L: 1327.5,1635 1267.5,1635 1267,1634.5 1267,1623 1325.5,1623 1327.5,1625
  region net L: 1383.5,1635 1325.5,1635 1324.5,1634 1325.5,1633 1325.5,1623 1380.5,1623 1383.5,1626
  region net L: 1444,1633 1381,1633 1381,1624 1380,1623 1444,1623
  region net L: 1503,1633 1444,1633 1444,1623 1503,1623
  region net L: 1556,1633 1503,1633 1503,1623 1504,1623 1556,1623
  region net L: 1612,1634 1555,1634 1556,1633 1556,1623 1603,1623
  region net L: 1635,1634 1612,1634 1602,1624 1603,1623 1635,1623
  region net L: 1687,1633 1686,1634 1635,1634 1635,1623 1686,1623
  region net L: 1503,1753 1021,1753 1021,1633 1028,1633 1503,1633
  region net L: 1687,1753 1687,1633 1503,1633 1503,1752 1503,1753
  region net L: 1790,1633 1780,1623 1741,1623 1741,1631 1739,1633
  region net L: 1021,1753 550,1753 545,1753 539,1753 539,1634 1021,1633
  region net L: 1685,1673 1685,1633 1705,1633
  region net L: 1685,2138 1686,1623 1706,1623 1741,1623 1739,2123 1724,2138
  region net L: 1800,2213 1770,2183 1770,1999
  region net L: 1795,2263 1800,2258 1800,2213 1795,2208
  region net L: 1694,2262 1685,2253 1685,2138 1705,2118 1795,2208 1795,2263
Multi-Layer:
  pour cut-out: 0,2549 1984,2549 1984,1537 0,1537
  pour cut-out: 1771,296 1773,294 2093,294 2093,133 2087,139 1765,139
  pour cut-out: 2064,961 2576,961 2576,516 2575,515 2569,521 2069,521

## Silkscreen, mask and mechanical layers (free items; w line width, h text height)
Top Overlay:
  text "+" at 497,2350 h60
  text "+" at 136,2349 h60
  text "+" at 1579,2349 h60
  text "+" at 857,2348 h60
  text "+" at 1218,2346 h60
  text "CLK" at 2331,2343 h30
  text "STM" at 2921,2313 h25 r90
  text "CS" at 2360,2299 h30
  text "-" at 2578,2295 h30 r90
  text "DIN" at 2333,2253 h30
  text "ESP" at 2921,2212 h25 r90
  text "DO" at 2358,2207 h30
  text "IRQ" at 2333,2161 h30
  text "ESP" at 2921,2113 h25 r90
  text "+" at 2574.33,2097 h20 r90
  text "STM" at 2922,2011 h25 r90
  text "VCC" at 2041,1802 h30
  text "GND" at 2042,1757 h30
  text "CS" at 2072,1711 h30
  text "RST" at 2042,1665 h30
  text "DC" at 2072,1620 h30
  text "MOSI" at 2022,1575 h30
  text "SCK" at 2042,1529 h30
  text "LED" at 2042,1482 h30
  text "MISO" at 2017,1437 h30
  text "GND" at 2072,1283 h30 r90
  text "3V3" at 2117,1283 h30 r90
  text "DIO" at 2161,1282 h30 r90
  text "CLK" at 2206,1282 h30 r90
  text "GND" at 1609,1051 h30 r90
  text "VCC" at 1653,1050 h30 r90
  text "SCL" at 1739,1050 h30 r90
  text "32K" at 1825,1050 h30 r90
  text "SDA" at 1696,1049 h30 r90
  text "SQW" at 1782,1049 h30 r90
  text "-" at 2978,129 h20 r90
  text "+" at 3063.33,128 h20 r90
  text "+" at 2518.33,126 h20 r90
  text "-" at 2537,126 h20 r90
  text "DT" at 2459,112 h20 r90
  text "NC" at 3001,110 h20 r90
  text "SW" at 2490,107 h20 r90
  text "OUT" at 3034,89 h20 r90
  text "CLK" at 2426,88 h20 r90
Bottom Overlay:
  drawing of 101 lines, arcs and shapes, not listed
  text "WARNING!" at 1292,2008 h120
  text "THE AC POWER" at 1346,1803 h80
  text "Smart Clock" at 1019,454 h60
  text "NGOC CAM" at 3534,367 h100
Mechanical 1:
  the board outline again, w10

## Text inside footprints (layer, text, board x,y; h text height)
*1: Mechanical 13 "ANTENNA" at 4028.24,964.57 h70 r270
BUZZER: Top Overlay "+" at 2331,1367 h80
J1: Mechanical 2 "PCB Edge" at 3953.92,2153.85 h16 r90
SW1: Top Overlay "ON" at 3062.13,2013.5 h40 r90; Top Component Outline "4" at 3243.24,2330.43 h40 r90; Top Component Outline "3" at 3243.24,2230.43 h40 r90; Top Component Outline "1" at 3243.24,2035.94 h40 r90; Top Component Outline "ON" at 3062.13,2013.5 h40 r90; Top Component Outline "2" at 3243.24,2130.43 h40 r90
U4: Top Overlay "16" at 3328.02,1619.98 h35 r270; Top Overlay "9" at 2896.37,1591.33 h35 r270; Top Overlay "8" at 2891.52,1902.11 h35 r270; Top Overlay "1" at 3323.02,1904.98 h35 r270